# EAGLE board mux_cable (EAGLE 9.6.2)
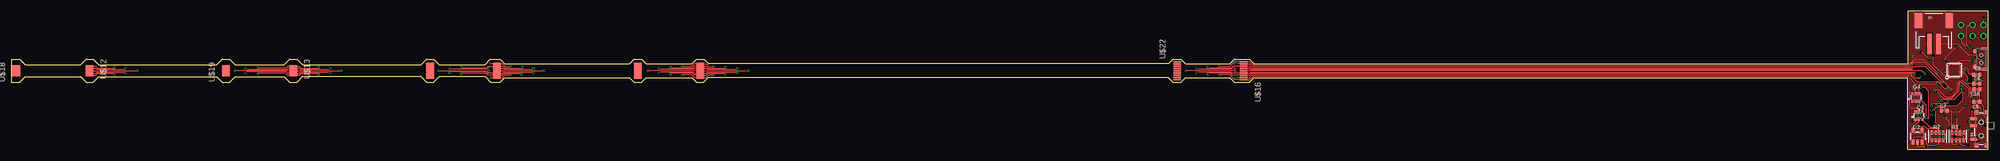
[diagram p0: board, top side]
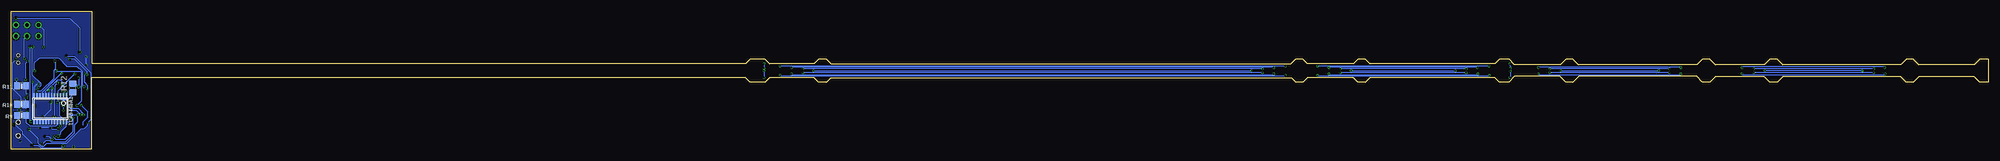
[diagram p1: board, bottom side, seen from below]

Size 436.62 x 30.48 mm. Coordinates in mm from the lower left corner, seen from the top.
Outline: 0,19.86 0,14.86 1.9,14.86 3.1,16.06 15.3,16.06 16.5,14.86 18.1,14.86 19.3,16.06 45.4,16.06 46.6,14.86 48.2,14.86 49.4,16.06 60.3,16.06 61.5,14.86 63.1,14.86 64.4,16.16 90.4,16.16 91.7,14.86 93.3,14.86 94.6,16.16 104.6,16.16 105.9,14.86 108,14.86 109,15.86 136.6,15.86 137.6,14.86 139.2,14.86 140.2,15.86 150.4,15.86 151.4,14.86 152.9,14.86 153.9,15.86 255.6,15.86 256.6,14.86 258.3,14.86 259.3,15.86 269.2,15.86 270.2,14.86 273.5,14.86 274.5,15.86 418.84,15.86 418.84,0 436.62,0 436.62,30.48 418.84,30.48 418.84,18.86 274.5,18.86 273.5,19.86 270.2,19.86 269.2,18.86 259.3,18.86 258.3,19.86 256.6,19.86 255.6,18.86 154,18.86 153,19.86 151.4,19.86 150.4,18.86 140.2,18.86 139.2,19.86 137.6,19.86 136.6,18.86 109,18.86 108,19.86 105.8,19.86 104.6,18.66 94.5,18.66 93.3,19.86 91.7,19.86 90.5,18.66 64.3,18.66 63.1,19.86 61.5,19.86 60.3,18.66 49.4,18.66 48.2,19.86 46.6,19.86 45.4,18.66 19.3,18.66 18.1,19.86 16.5,19.86 15.3,18.66 3.1,18.66 1.9,19.86 0,19.86
Copper layers (1*16): Top 0.035mm / dielectric 1.6mm / Bottom 0.035mm
Design rules "jlcpcb-2layers *": minimum track width 5mil, minimum drill 0.3mm, track to track 5mil, track to pad 5mil, pad to pad 5mil, via to via 5mil, smd to smd 5mil, copper to edge 0.2mm, drill to drill 6mil, minimum pad ring 10mil, minimum via ring 3mil, stop-mask expansion 4mil, vias tented up to drill 20mil, thermal gap 10mil
Net classes: 1 highpower: width 0.254 mm, drill 0.483 mm; 2 lowpower: width 0.203 mm, drill 0.483 mm

## Footprints (pad centres in the part's own frame; a part is rotated, then mirrored left to right if it is on the bottom)
C0402 = smd 0.7 x 0.9: 1 -0.65,0; 2 0.65,0
JST-2-SMD = smd 1 x 4.6: 1 -1,-3.7; 2 1,-3.7 | smd 1.6 x 3.4: NC1 -3.4,1.5; NC2 3.4,1.5
SOT363 = smd 0.5 x 0.5: 1 -0.75,-0.9; 3 0.75,-0.9; 4 0.75,0.9; 6 -0.75,0.9 | smd 0.4 x 0.5: 2 0,-0.9; 5 0,0.9
RESPACK_4X0603 = smd 0.45 x 0.9: 1 -1.3,-0.85; 2 -0.4,-0.85; 3 0.4,-0.85; 4 1.3,-0.85; 5 1.3,0.85; 6 0.4,0.85; 7 -0.4,0.85; 8 -1.3,0.85
0805-NO = smd 1.3 x 1.5: 1 -0.95,0; 2 0.95,0
R0805 = smd 1.3 x 1.5: 1 -0.95,0; 2 0.95,0
SWITCH_SPST_SMD_A = smd 0.7 x 1.5: 1 -2.25,-1.75; 2 -0.75,-1.75; 3 2.25,-1.75 | smd 1 x 0.6: GND1 -3.65,1; GND3 3.65,1 | smd 1 x 0.8: GND2 -3.65,-1.1; GND4 3.65,-1.1 | hole 0.9: -1.5,0; 1.5,0
MICROBUILDER_TSSOP24 = smd 0.305 x 0.991: 1 -3.575,-2.918; 2 -2.925,-2.918; 3 -2.275,-2.918; 4 -1.625,-2.918; 5 -0.975,-2.918; 6 -0.325,-2.918; 7 0.325,-2.918; 8 0.975,-2.918; 9 1.625,-2.918; 10 2.275,-2.918; 11 2.925,-2.918; 12 3.575,-2.918; 13 3.575,2.918; 14 2.925,2.918; 15 2.275,2.918; 16 1.625,2.918; 17 0.975,2.918; 18 0.325,2.918; 19 -0.325,2.918; 20 -0.975,2.918; 21 -1.625,2.918; 22 -2.275,2.918; 23 -2.925,2.918; 24 -3.575,2.918
SOT23-5 = smd 0.55 x 1.2: 1 -0.95,-1.3; 2 0,-1.3; 3 0.95,-1.3; 4 0.95,1.3; 5 -0.95,1.3
FPC0505 = smd 0.3 x 1.7: P$1 -1,0.1; P$2 -0.5,0.1; P$3 0,0.1; P$4 0.5,0.1; P$5 1,0.1
FPC0705 = smd 0.3 x 1.7: P$1 -1.5,0; P$2 -1,0; P$3 -0.5,0; P$4 0,0; P$5 0.5,0; P$6 1,0; P$7 1.5,0
FPC0905 = smd 0.3 x 1.7: P$1 -2,0; P$2 -1.5,0; P$3 -1,0; P$4 -0.5,0; P$5 0,0; P$6 0.5,0; P$7 1,0; P$8 1.5,0; P$9 2,0
QFN24_3MM_NOEP = smd 0.55 x 0.2: 1 -1.5,1; 2 -1.5,0.6; 3 -1.5,0.2; 4 -1.5,-0.2; 5 -1.5,-0.6; 6 -1.5,-1; 13 1.5,-1; 14 1.5,-0.6; 15 1.5,-0.2; 16 1.5,0.2; 17 1.5,0.6; 18 1.5,1 | smd 0.2 x 0.55: 7 -1,-1.5; 8 -0.6,-1.5; 9 -0.2,-1.5; 10 0.2,-1.5; 11 0.6,-1.5; 12 1,-1.5; 19 1,1.5; 20 0.6,1.5; 21 0.2,1.5; 22 -0.2,1.5; 23 -0.6,1.5; 24 -1,1.5
2*4*3.5 = smd 0.6 x 1.2: P$1 2.3,0.6; P$2 -2.3,0.6 | smd 0.9 x 0.8: P$3 -1.7,-1.4; P$4 1.7,-1.4 | hole 0.7: -0.85,0; 0.85,0
M0.9-HOLE = drill 0.8 pad 0.55: P$1 0,0

## Placement (x,y rotation side)
C5  1uF  [C0402]  434.12,10.48 180 top
C6  2.2uF  [C0402]  434.12,14.48 0 top
C7  0.1uF  [C0402]  426.92,8.48 180 top
C9  0.1uF  [C0402]  434.12,16.48 0 top
C10  10uF  [C0402]  434.13,13.26 180 top
J2  [JST-2-SMD]  424.62,26.98 0 top
Q1  BSS138  [SOT363]  421.32,7.48 0 top
Q4  BSS138  [SOT363]  420.62,11.48 0 top
R1  10K  [RESPACK_4X0603]  429.92,2.88 0 top
R7  4.7K  [RESPACK_4X0603]  425.42,2.88 180 top
R9  10K  [0805-NO]  434.33,7.48 180 bottom
R10  10K  [0805-NO]  434.33,9.98 180 bottom
R11  10K  [0805-NO]  434.33,14.02 180 bottom
R12  10k  [R0805]  423.05,13.52 90 bottom
S1  [SWITCH_SPST_SMD_A]  435.12,4.48 270 top
TCA9448A1  [MICROBUILDER_TSSOP24]  428.02,8.98 180 bottom
U2  MIC5225-1.8V  [SOT23-5]  421.02,2.88 0 top
U$12  FPC050505  [FPC0505]  17.2,17.36 270 top
U$13  FPC050505  [FPC0505]  62.2,17.36 270 top
U$14  FPC070505  [FPC0705]  152.2,17.36 270 top
U$15  FPC070505  [FPC0705]  107.2,17.36 270 top
U$16  FPC090505  [FPC0905]  272.2,17.36 270 top
U$18  FPC050505  [FPC0505]  1.2,17.36 90 top
U$19  FPC050505  [FPC0505]  47.5,17.36 90 top
U$20  FPC070505  [FPC0705]  92.5,17.36 90 top
U$21  FPC070505  [FPC0705]  138.4,17.36 90 top
U$22  FPC090505  [FPC0905]  257.5,17.36 90 top
U$39  MPU-9250_ICM20948  [QFN24_3MM_NOEP]  429.12,17.48 90 top
U$58  24*3.5  [2*4*3.5]  435.12,19.98 270 top
U$59  M0.9-HOLE0.9MM  [M0.9-HOLE]  435.62,27.48 180 top
U$60  M0.9-HOLE0.9MM  [M0.9-HOLE]  435.62,24.98 180 top
U$61  M0.9-HOLE0.9MM  [M0.9-HOLE]  433.12,24.98 180 top
U$62  M0.9-HOLE0.9MM  [M0.9-HOLE]  433.12,27.48 180 top
U$63  M0.9-HOLE0.9MM  [M0.9-HOLE]  430.62,24.98 180 top
U$64  M0.9-HOLE0.9MM  [M0.9-HOLE]  430.62,27.48 180 top

## Library data of the parts
C5-C7 C9 C10 = rcl; SPICEPREFIX: C
J2 = SparkFun-Connectors; PROD_ID: CONN-11443; SF_ID: PRT-08612
Q1 Q4 R1 R7 R9-R11 U2 = microbuilder
R12 = rcl; SPICEPREFIX: R
S1 = SparkFun-Switches; PROD_ID: SWCH-10651; SF_SKU: COM-10860
TCA9448A1 = Adafruit TCA9548A
U$12-U$16 U$18-U$22 = my_library
U$39 = adafruit_sensor
U$58 = 2x4x3.5sw
U$59-U$64 = M3-Hole

## Nets
1.8V: C6.1 C7.1 Q1.2 Q1.5 Q4.5 R1.4 R1.8 R7.8 U2.5 U$12.P$4 U$13.P$4 U$14.P$5 U$15.P$5 U$16.P$6 U$39.8 U$39.13
BATTERY: S1.2 U$62.P$1
BUTTON: U$58.P$4 U$61.P$1
GND: C5.2 C6.2 C7.2 C9.2 C10.2 J2.1 R9.2 R10.2 R11.2 S1.3 TCA9448A1.12 U2.2 U$12.P$1 U$13.P$1 U$14.P$2 U$15.P$2 U$16.P$3 U$39.18 U$39.20 U$58.P$3 U$60.P$1
N$1: J2.2 S1.1
N$6: R9.1 TCA9448A1.21
N$7: R10.1 TCA9448A1.2
N$8: R11.1 TCA9448A1.1
REGOUT1: C9.1 U$39.10
RESET1: R12.1 TCA9448A1.3
SCK/SCL_1.8V: Q1.4 R1.1 U$39.23
SCL: TCA9448A1.22 U$64.P$1
SCL1: Q1.3 R1.6 TCA9448A1.5 U$16.P$4
SCL2: TCA9448A1.7 U$14.P$3 U$15.P$3 U$16.P$2
SCL3: TCA9448A1.9 U$12.P$2 U$13.P$2 U$14.P$1 U$15.P$1 U$16.P$1
SDA: TCA9448A1.23 U$63.P$1
SDA1: Q1.6 R1.7 TCA9448A1.4 U$16.P$5
SDA2: TCA9448A1.6 U$14.P$4 U$15.P$4 U$16.P$8
SDA3: TCA9448A1.8 U$12.P$3 U$13.P$3 U$14.P$7 U$15.P$7 U$16.P$9
SDI/SDA_1.8V: Q1.1 R1.5 U$39.24
SDO/ADR1: Q4.3 R7.2
SDO/ADR_1.8V: Q4.4 R7.1 U$39.9
VIN: C5.1 C10.1 R1.2 R1.3 R7.7 R12.2 TCA9448A1.24 U2.1 U2.3 U$12.P$5 U$13.P$5 U$14.P$6 U$15.P$6 U$16.P$7 U$59.P$1

## Tracks (layer width: path | path; a pad name or v marks a point on that pad's centre or on a via)
1.8V  (via drill 0.3, 0.35)
  Top 0.127: U$12.P$4 18.7,16.86 18.9,17.06 25.18,17.06 v25.3,16.94 | v51.8,16.94 51.96,17.11 60.75,17.11 61,16.86 U$13.P$4 63.6,16.86 63.8,17.06 70.28,17.06 v70.4,16.94 | v96.8,16.94 96.97,17.11 104.95,17.11 105.21,16.84 107.2,16.84 U$15.P$5 108.5,16.86 108.7,17.06 115.18,17.06 v115.3,16.94 | v143.1,16.94 143.22,17.06 150.7,17.06 150.9,16.86 U$14.P$5 153.5,16.86 153.7,17.06 160.18,17.06 v160.3,16.94 | v261.8,16.94 261.92,17.06 269.4,17.06 269.6,16.86 U$16.P$6 273.5,16.86 273.7,17.06 420.33,17.06 420.46,16.93 v420.46,16.69 | Q1.5 421.32,8.92 421.06,9.18 419.5,9.18 419.27,9.41 419.27,12.69 v419.7,13.12 420.22,13.12 420.62,12.72 Q4.5
  Top 0.152: U2.5 420.07,5.03 420.68,5.64 420.91,5.64 421.3,6.03 421.3,6.56 Q1.2 v421.32,7.63 Q1.5 | 429.14,3.06 430.91,3.06 431.22,2.75 R1.4 | 429.14,3.06 429.24,2.96 v429.24,2.9 | 429.14,3.06 428.62,3.58 R1.8 428.62,8.21 | v424.08,8.63 424.43,8.63 424.94,9.13 426.92,9.13 C7.1 428.35,8.48 428.62,8.21 | v427.61,2.16 426.85,2.16 R7.8 | v433.04,19.46 432.81,19.69 430.44,19.69 430.12,19.37 U$39.13 | v433.47,15.39 C6.1 433.44,14.51 432.38,14.51 v432.02,14.87 432.02,16.18 431.32,16.88 U$39.8 | v431.45,9.56 430.1,8.21 428.62,8.21
  Bottom 0.127: v25.3,16.94 v51.8,16.94 | v70.4,16.94 v96.8,16.94 | v115.3,16.94 v143.1,16.94 | v160.3,16.94 v261.8,16.94 | v420.46,16.69 420.46,14.8 419.7,14.04 v419.7,13.12
  Bottom 0.152: v424.08,8.63 422.32,8.63 v421.32,7.63 | v429.24,2.9 428.35,2.9 v427.61,2.16 | v433.47,15.39 433.47,19 433.04,19.43 v433.04,19.46 | v432.02,14.87 432.02,10.03 431.55,9.56 v431.45,9.56
BATTERY  (via drill 0.35)
  Top 0.152: v432.32,6.15 433.24,5.23 S1.2 | v432.49,22.57 431.93,23.13 431.93,26.98 432.43,27.48 U$62.P$1
  Bottom 0.152: v432.32,6.15 432.49,6.32 v432.49,22.57
BUTTON  (via drill 0.35)
  Top 0.152: U$58.P$4 v433.73,20.02
  Bottom 0.152: v433.73,20.02 433.73,24.37 U$61.P$1
GND  (via drill 0.3, 0.35)
  Top 0.127: U$12.P$1 18.6,18.36 19,17.96 22.76,17.96 v22.88,18.08 | v54.37,18.03 54.53,17.87 60.51,17.87 61,18.36 U$13.P$1 63.6,18.36 64.05,17.91 67.72,17.91 v67.88,18.08 | v99.32,18.08 99.44,17.96 104.9,17.96 105.3,18.36 U$15.P$2 108.5,18.36 108.9,17.96 112.66,17.96 v112.78,18.08 | v145.62,18.08 145.74,17.96 150.5,17.96 150.9,18.36 U$14.P$2 153.5,18.36 153.9,17.96 157.66,17.96 v157.78,18.08 | v264.32,18.08 264.44,17.96 269.4,17.96 269.8,18.36 U$16.P$3 273.5,18.36 273.9,17.96 419.5,17.96 420.11,18.57 v420.11,18.66
  Top 0.152: C6.2 434.77,14.7 v435.5,15.43 | C5.2 434.95,9 v434.95,8.72 | S1.3 434.22,2.23 v434.64,1.81
  Top 0.254: v422.88,0.57 421.25,0.57 421.01,0.81 U2.2
  Bottom 0.127: v54.37,18.03 54.2,18.19 23,18.19 v22.88,18.08 | v67.88,18.08 68,18.19 99.21,18.19 v99.32,18.08 | v112.78,18.08 112.9,18.19 145.51,18.19 v145.62,18.08 | v264.32,18.08 264.21,18.19 157.9,18.19 v157.78,18.08 | v420.11,18.66 v420.11,20.45
  Bottom 0.152: v435.5,15.43 435.5,14.24 R11.2 | TCA9448A1.12 431.6,13.79 430.97,14.41 v430.65,14.41
  pour Bottom: 436.62,-0.02 418.82,-0.02 418.82,30.38 436.62,30.38 436.62,0.08
  pour Top: 436.62,-0.02 418.72,-0.02 418.72,30.48 436.52,30.48 436.62,30.38
N$1  (via drill 0.35)
  Top 0.152: S1.1 433.11,6.99 v433.11,8.66 | v435.64,19.84 434.81,19.84 433.86,20.79 432.31,20.79 429.82,23.28 J2.2
  Bottom 0.152: v435.64,19.84 436.34,19.14 436.34,13.4 434.42,11.47 434.42,9.33 434.11,9.03 433.48,9.03 v433.11,8.66
N$6
  Bottom 0.152: TCA9448A1.21 426.4,5.5 426.66,5.23 432.6,5.23 433.38,6.01 R9.1
N$7  (via drill 0.35)
  Top 0.127: v425.24,12.82 426.74,11.32 428.61,11.32 430.2,12.91 430.2,14.59 430.46,14.85 430.82,14.85 430.83,14.86
  Top 0.152: v433.38,11.39 432.89,11.39 432.39,11.88 432.39,13.3 430.83,14.86
  Bottom 0.152: v425.24,12.82 425.1,12.68 TCA9448A1.2 | R10.1 v433.38,11.39
N$8  (via drill 0.35)
  Top 0.127: 431.06,15.14 431.05,15.13 430.38,15.13 429.95,14.69 429.95,13.02 428.55,11.62 427.17,11.62 425.47,13.31 424.75,13.31 424.43,12.99 v424.43,12.8
  Top 0.152: v432.99,11.98 432.74,12.23 432.74,13.46 431.06,15.14
  Bottom 0.152: v424.43,12.8 424.43,11.91 TCA9448A1.1 | v432.99,11.98 433.38,12.37 R11.1
REGOUT1
  Top 0.127: C9.1 432.66,16.48 432.21,16.94 432.21,17.69
  Top 0.152: 432.21,17.69 431.92,17.97 431.52,17.97 431.23,17.68 U$39.10
RESET1
  Bottom 0.152: TCA9448A1.3 425.75,11.18 425.51,10.94 424.19,10.94 423.05,12.08 R12.1
SCK/SCL_1.8V  (via drill 0.35)
  Top 0.152: v422.16,9.67 422.07,9.58 Q1.4 421.96,8.27 v421.96,7.61 | U$39.23 427.1,16.88 426.72,17.26 v426.72,17.28 | R1.1 428.62,1.34 428.79,1.17 v429.84,1.17
  Bottom 0.152: v424.12,7.64 421.99,7.64 v421.96,7.61 421.96,6.15 422.66,5.45 422.66,3.65 424.6,1.71 427.81,1.71 428.15,2.05 428.96,2.05 v429.84,1.17 | v426.72,17.28 421.41,17.28 421.19,17.06 421.19,10.64 v422.16,9.67
SCL  (via drill 0.35)
  Top 0.152: v425.76,5.17 425.07,5.87 v425.07,8.59 | v425.07,9.59 429.78,9.59 431.12,10.93 v431.12,12.89 | v429.52,22.61 427.04,20.13 v427.04,19.53
  Bottom 0.152: TCA9448A1.22 425.75,5.19 v425.76,5.17 | v425.07,8.59 v425.07,9.59 | v431.12,12.89 430.03,12.89 427.17,15.75 427.17,17.47 426.84,17.8 426.84,19.33 v427.04,19.53 | U$64.P$1 429.51,26.37 v429.51,22.62 v429.52,22.61
SCL1  (via drill 0.3, 0.35)
  Top 0.127: U$16.P$4 273.5,17.86 273.7,17.66 419.75,17.66 420.47,18.38 422.7,18.38 v426.42,14.66 | Q1.3 423.82,4.83 | v430.32,4.78 R1.6
  Top 0.152: v427.06,7.21 427.06,7.14 427.93,6.15 v427.93,4.78 | v426.27,4.49 425.8,4.49 425.47,4.83 423.82,4.83
  Bottom 0.127: v426.42,14.66 427.05,14.04 TCA9448A1.5
  Bottom 0.152: v430.32,4.78 v427.93,4.78 427.6,4.45 426.31,4.45 v426.27,4.49 | TCA9448A1.5 427.02,11.87 427.02,7.25 v427.06,7.21
SCL2  (via drill 0.3)
  Top 0.127: U$15.P$3 108.5,17.86 108.7,17.66 115.18,17.66 v115.3,17.78 | v270.4,18.86 U$16.P$2 273.5,18.86 274.1,18.26 419.07,18.26 420.1,19.29 422.43,19.29 428.34,13.38 v428.34,12.9 | v270.4,17.94 269.79,17.94 269.51,17.66 261.92,17.66 v261.8,17.78 | v143.1,17.78 143.22,17.66 150.7,17.66 150.9,17.86 U$14.P$3 153.5,17.86 153.7,17.66 160.18,17.66 v160.3,17.78
  Bottom 0.127: v270.4,18.86 v270.4,17.94 | v115.3,17.78 v143.1,17.78 | v160.3,17.78 v261.8,17.78 | v428.34,12.9 v428.35,12.9 TCA9448A1.7
SCL3  (via drill 0.3)
  Top 0.127: U$15.P$1 108.5,18.86 109.1,18.26 110.14,18.26 v110.27,18.39 | U$12.P$2 18.7,17.86 18.9,17.66 25.18,17.66 v25.3,17.78 | v105.58,17.86 105.39,17.66 96.92,17.66 v96.8,17.78 | v51.8,17.78 51.96,17.61 60.75,17.61 61,17.86 U$13.P$2 63.6,17.86 63.8,17.66 70.28,17.66 v70.4,17.78 | v148.14,18.38 148.3,18.21 150.25,18.21 150.9,18.86 U$14.P$1 153.5,18.86 154.1,18.26 155.14,18.26 v155.26,18.38 | v266.84,18.38 267,18.21 269.05,18.21 270.2,19.36 U$16.P$1 273.5,19.36 274.3,18.56 418.97,18.56 420.12,19.71 422.6,19.71 v425.5,16.81
  Top 0.152: U$15.P$1 v105.6,18.86
  Bottom 0.127: v105.6,18.86 105.58,17.96 v105.58,17.86 | v25.3,17.78 v51.8,17.78 | v70.4,17.78 v96.8,17.78 | v110.27,18.39 110.38,18.49 148.03,18.49 v148.14,18.38 | v155.26,18.38 155.38,18.5 266.72,18.5 v266.84,18.38 | TCA9448A1.9 429.65,12.73 425.56,16.81 v425.5,16.81
SDA  (via drill 0.35)
  Top 0.152: v425.89,10.67 426.21,10.99 429,10.99 430.66,12.65 v430.66,13.68 | U$63.P$1 430.62,23.76 v431.8,22.58
  Bottom 0.152: TCA9448A1.23 425.1,6.62 425.89,7.41 v425.89,10.67 | v431.8,22.58 431.98,22.4 431.98,16.4 430.16,14.58 430.16,14 430.48,13.68 v430.66,13.68
SDA1  (via drill 0.3, 0.35)
  Top 0.127: v422.58,16.69 421.91,17.36 U$16.P$5 | Q1.6 420.57,7.73 | v429.52,7.12 R1.7
  Top 0.152: 420.57,7.73 v420.68,7.62 | v427.82,10.45 427.69,10.32 v426.49,10.32 426.35,10.19 424.39,10.19 424.1,9.89 v424.1,9.58
  Bottom 0.127: v422.58,16.69 422.58,16.67 426.4,12.86 TCA9448A1.4
  Bottom 0.152: v420.68,7.62 v420.69,7.63 420.69,7.9 421.85,9.06 423.57,9.06 v424.1,9.58 | v429.52,7.12 427.82,8.82 v427.82,10.45 | TCA9448A1.4 426.4,10.41 v426.49,10.32
SDA2  (via drill 0.3)
  Top 0.127: v270.4,15.86 U$16.P$8 273.5,15.86 274.1,16.46 419.3,16.46 420.85,14.91 425.58,14.91 426.95,13.54 v427.58,13.54 v427.59,13.55 | v140.7,17.36 U$14.P$4 v162.7,17.36 | U$15.P$4 v117.7,17.36 | v270.4,17.36 v259.4,17.36
  Bottom 0.127: v270.4,17.36 v270.4,15.86 | v140.7,17.36 v117.7,17.36 | v259.4,17.36 v162.7,17.36 | TCA9448A1.6 427.59,12.01 v427.59,13.55
SDA3  (via drill 0.3)
  Top 0.127: v105.6,15.86 U$15.P$7 108.5,15.86 109.1,16.46 110.06,16.46 v110.18,16.34 | v105.58,17.26 105.47,17.36 v94.4,17.36 | v49.3,17.36 U$13.P$3 v72.8,17.36 | U$12.P$3 v27.8,17.36 | v148.14,16.34 148.26,16.46 150.3,16.46 150.9,15.86 U$14.P$7 153.5,15.86 154.1,16.46 155.14,16.46 v155.26,16.34 | v266.84,16.34 266.96,16.46 269.1,16.46 270.2,15.36 U$16.P$9 273.5,15.36 274.3,16.16 418.94,16.16 420.67,14.43 v425.42,14.43
  Bottom 0.127: v105.6,15.86 105.58,15.89 v105.58,17.26 | v27.8,17.36 v49.3,17.36 | v94.4,17.36 v72.8,17.36 | v110.18,16.34 110.3,16.23 148.03,16.23 v148.14,16.34 | v155.26,16.34 155.38,16.22 266.72,16.22 v266.84,16.34 | TCA9448A1.8 429,12.84 426.52,15.31 425.75,15.31 425.42,14.98 v425.42,14.43
SDI/SDA_1.8V  (via drill 0.35)
  Top 0.152: Q1.1 420.57,6.05 420.2,5.9 v419.76,5.9 | R1.5 431.87,4.38 v432.68,4.38 | U$39.24 427.46,16.48 427.46,16.49 426.72,16.49 424.49,18.72 v424.49,20.58
  Bottom 0.127: 422.77,20.58 419.13,16.94 419.13,6.53
  Bottom 0.152: v424.49,20.58 422.77,20.58 | v432.68,4.38 430.77,2.47 430.77,1.46 430.03,0.72 429.49,0.72 428.84,1.37 424.33,1.37 421.19,4.51 420.52,4.51 419.76,5.27 v419.76,5.9 419.13,6.53
SDO/ADR1  (via drill 0.3, 0.35)
  Top 0.127: Q4.3 421.37,9.92 v421.17,9.72
  Top 0.152: R7.2 425.82,4.08 425.35,4.55 423.16,4.55 422.71,5 v420.74,5
  Bottom 0.152: v420.74,5 420.74,6.1 419.75,7.09 419.75,8.3 v421.17,9.72
SDO/ADR_1.8V  (via drill 0.35)
  Top 0.152: R7.1 427.1,3.35 427.1,3.32 427.11,3.35 v427.11,2.86 | v422.98,7 422.98,9.69 421.92,10.75 421.92,12.17 421.71,12.38 Q4.4 421.37,13.07 v420.58,13.86 v420.58,13.87 | U$39.9 431.48,17.28 v431.53,17.33
  Bottom 0.152: v427.11,2.86 427.11,2.57 426.78,2.24 424.69,2.24 422.98,3.95 v422.98,7 | v431.53,17.33 431.53,19.07 430.39,20.22 426.17,20.22 424.34,18.39 422.12,18.39 420.89,17.15 420.89,14.17 v420.58,13.87
VIN  (via drill 0.3, 0.48)
  Top 0.127: U$12.P$5 18.6,16.36 19,16.76 22.66,16.76 v22.78,16.64 | v54.37,16.69 54.53,16.85 60.51,16.85 61,16.36 U$13.P$5 63.6,16.36 64,16.76 67.76,16.76 v67.88,16.64 | v99.37,16.69 99.44,16.76 104.9,16.76 105.3,16.36 U$15.P$6 108.5,16.36 108.9,16.76 112.58,16.76 v112.7,16.64 | v145.62,16.64 145.74,16.76 150.5,16.76 150.9,16.36 U$14.P$6 153.5,16.36 153.9,16.76 157.66,16.76 v157.78,16.64 | v264.32,16.64 264.44,16.76 269.3,16.76 269.7,16.36 U$16.P$7 273.5,16.36 273.9,16.76 419.59,16.76 v419.88,16.47 420.57,15.78 v421.75,15.78 | 423.66,19.86 v423.68,19.86
  Top 0.254: 421.86,2.68 421.97,2.57 U2.3 | 421.86,2.68 422.84,2.68 423.09,2.43 423.09,1.24 423.53,0.8 v425.18,0.8 425.82,1.44 R7.7 425.82,2.42 v426.27,2.88 | 421.86,2.68 420.26,2.68 420.07,2.49 U2.1 | R1.2 R1.3 430.32,1.4 430.35,1.38 430.35,1.35 430.75,0.94 v432.05,0.94 | v435.98,5.48 435.98,7.11 435.57,7.53 435.57,9.68 C5.1 C10.1 | v423.55,6.41 423.55,12.86 422.59,13.82 v421.75,13.82 | U$59.P$1 v435.62,28.99 | 423.66,19.86 422.12,21.41 v421.55,21.41
  Bottom 0.127: v54.37,16.69 54.2,16.53 22.9,16.53 v22.78,16.64 | v67.88,16.64 68,16.53 99.21,16.53 v99.37,16.69 | v145.62,16.64 145.51,16.53 112.82,16.53 v112.7,16.64 | v264.32,16.64 264.21,16.53 157.9,16.53 v157.78,16.64 | v419.88,16.47 419.88,17.12 422.62,19.86 v423.68,19.86 | v421.75,15.78 v421.75,13.82
  Bottom 0.254: v425.18,0.8 425.6,0.39 430.17,0.39 430.72,0.94 v432.05,0.94 432.05,1.27 434.2,3.42 434.2,3.96 435.72,5.48 v435.98,5.48 | v426.27,2.88 425.69,3.46 425.69,3.9 424.44,5.15 TCA9448A1.24 423.86,6.06 423.53,6.39 v423.55,6.41 | R12.2 422.4,14.47 v421.75,13.82 | v435.62,28.99 423.68,28.99 421.55,26.86 v421.55,21.41